# Altium PCB ecoVENTPS_v1.1.PcbDoc
Units mm, origin at the board's own origin, x right, y up, seen from the top; angles counter-clockwise.
Board outline 18 x 8 mm, 4 copper layers (Top Layer, GND, VCC, Bottom Layer), stack 1.733 mm thick; 21 components, 10 nets, 39 pads, 7 vias.
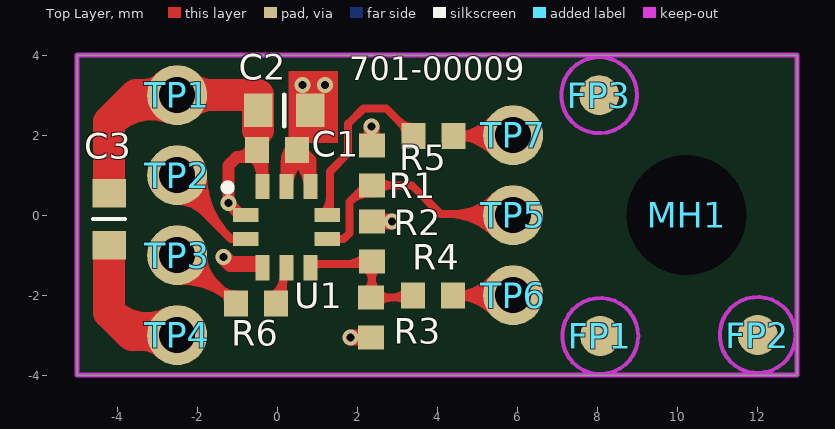
[diagram p0: Top Layer view]
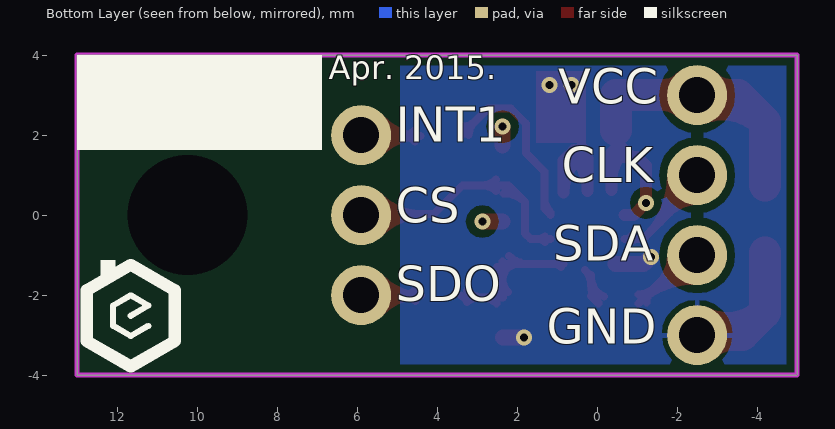
[diagram p1: Bottom Layer view, seen from below]
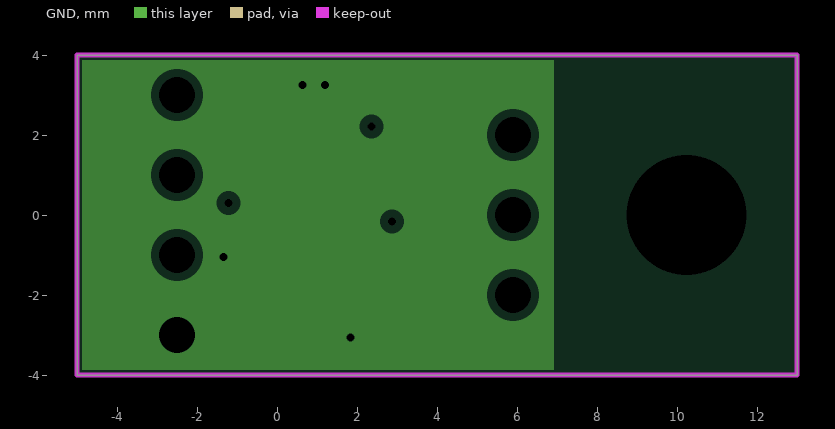
[diagram p2: GND, clearances drawn from the general rule]
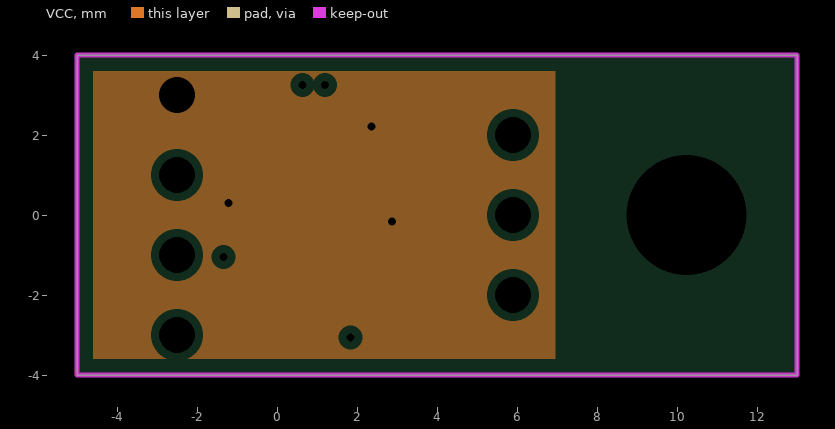
[diagram p3: VCC, clearances drawn from the general rule]
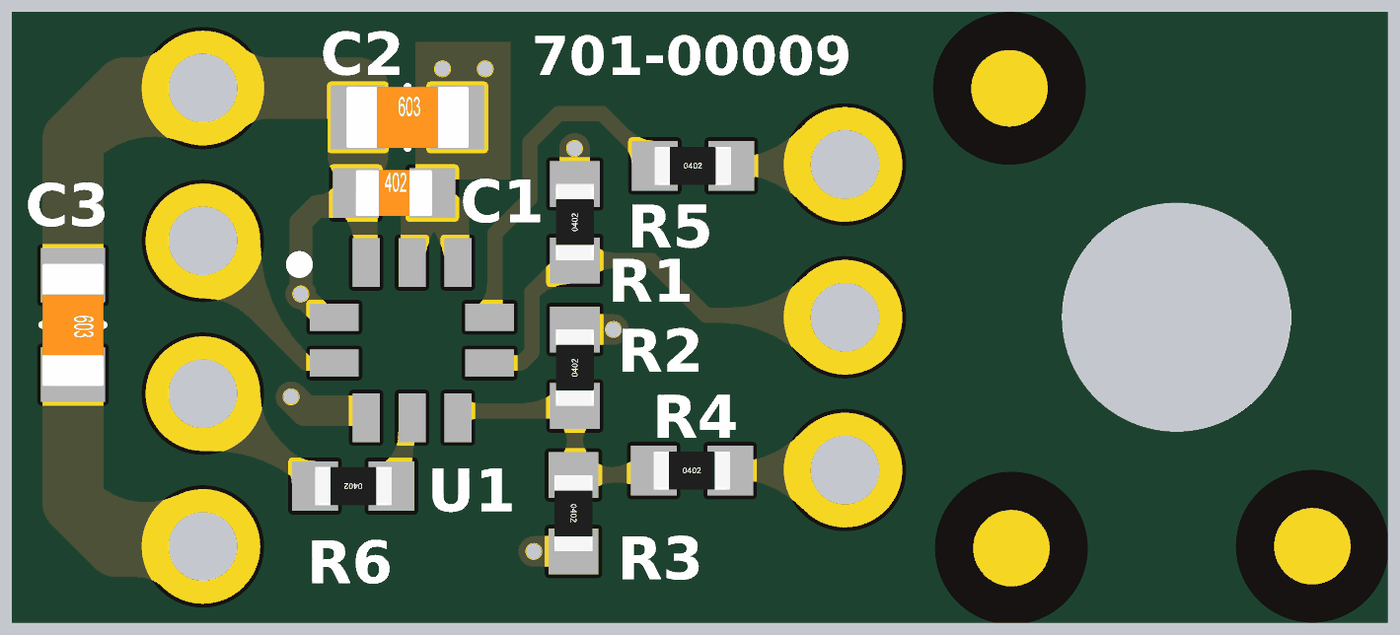
[diagram p4: 3D render of the assembled board from above, using the file's embedded part models]

## Layer stack, top to bottom
Top Solder: solder mask 0.0102, Solder Resist, Dk 3.5
Top Layer: signal copper 0.0525
Dielectric1: prepreg 0.3038, FR-4, Dk 4
GND: plane copper 0.035, net GND
Dielectric2: core 0.95, FR-4, Dk 4
VCC: plane copper 0.035, net VCC
Dielectric3: prepreg 0.3038, FR-4, Dk 4
Bottom Layer: signal copper 0.0525
Bottom Solder: solder mask 0.0102, Solder Resist, Dk 3.5

## Board outline
-5,-4 -5,4 13,4 13,-4

## Design rules (kind name [scope] priority, off if disabled: settings)
Clearance Clearance_KeepOut [(InNamedPolygon('Top Layer-GND FILL'))or (InNamedPolygon('Bot Layer-GND FILL')) vs (IsTrack AND OnLayer('Keep-Out Layer'))] p1: gap=0.3
Clearance "Clearance_GND FILL" [(InNamedPolygon('Top Layer-GND FILL'))or (InNamedPolygon('Bottom Layer-GND FILL'))] p2: gap=0.2
Clearance [All] p3: gap=0.127
ComponentClearance [All] p1: gap=0 collisioncheckmode=3 verticalgap=0.254 showdistances=FALSE
DiffPairsRouting [All] p1: maxlimit=0.254 minlimit=0.2 mostfreqgap=0.2 toplayer_minwidth=0.3 toplayer_maxwidth=0.381 toplayer_prefwidth=0.381 bottomlayer_minwidth=0.3 bottomlayer_maxwidth=0.381 bottomlayer_prefwidth=0.381 maxuncoupledlength=12.7
HoleSize [All] p1: absolutevalues=TRUE maxlimit=6 minlimit=0.025 maxpercent=80.000 minpercent=20.000
HoleToHoleClearance [All] p1: gap=0.2 allowstackedmicrovias=TRUE
MinimumSolderMaskSliver [All] p1: minsoldermaskwidth=0.05
PlaneClearance [All] p1: clearance=0.2
PlaneConnect [All] p1: planeconnectstyle=Relief reliefexpansion=0.127 reliefentries=4 reliefconductorwidth=0.127 reliefairgap=0.127
PolygonConnect "PolygonConnect_Components TR" [(IsNamedPolygon('Top Layer-GND FILL')) or (IsNamedPolygon('Bottom Layer-GND FILL')) vs (InComponent('TP4'))] p1: connectstyle=Relief reliefconductorwidth=0.127 reliefentries=4 polygonreliefangle="90 Angle" airgapwidth=0.127
PolygonConnect [All] p2: connectstyle=Direct reliefconductorwidth=0.2 reliefentries=4 polygonreliefangle="90 Angle" airgapwidth=0.254
RoutingVias [All] p1: holewidth=0.3 width=0.6 viastyle="Through Hole" minholewidth=0.2 minwidth=0.4 maxholewidth=1 maxwidth=2
SilkToSilkClearance [All] p1 off: silktosilkclearance=0.254
SilkToSolderMaskClearance SilkscreenOverComponentPads [IsPad] p1 off: minsilkscreentomaskgap=0.001 clearancetoexposedcopper=TRUE
SolderMaskExpansion [All] p1: expansion=0.05
Width [All] p1: maxlimit=5 minlimit=0.127 preferedwidth=0.127
20 further rules are at their usual default settings.

## Classes and differential pairs
component class "eVPS_Cover Page": FP1 FP2 FP3 MH1
component class eVPS_Sensor: C1 C2 C3 R1 R2 R3 R4 R5 R6 TP1 TP2 TP3 TP4 TP5 TP6 TP7 U1
component class "eVPS_Top Level": S1 W1 W2 W3 W4

## Components (designator, comment, footprint, x,y, rotation, side; value= is the part's Value field where it differs from the comment)
C1 "0.1uF" CAPC1005X60N 0,1.626 r0 top
C2 "10uF" CAPC1608X95B 0.178,2.616 r0 top
C3 "10uF" CAPC1608X95B -4.2,-0.1 r270 top
FP1 "FP 1/2mm" FIDUCIAL_POINT_1MM 8.077,-3.023 r0 top
FP2 "FP 1/2mm" FIDUCIAL_POINT_1MM 12.014,-2.997 r90 top
FP3 "FP 1/2mm" FIDUCIAL_POINT_1MM 8.052,2.997 r90 top
MH1 "MH 3/6mm" MHOLE_TH_3-6MM 10.236,0 r0 top
R1 "10K" RESC1005X40AN 2.366,1.245 r90 top
R2 "DNP" RESC1005X40AN 2.366,-0.66 r90 top
R3 "10K" RESC1005X40AN 2.348,-2.565 r270 top
R4 "DNP" RESC1005X40AN 3.897,-2.007 r0 top
R5 "DNP" RESC1005X40AN 3.912,1.981 r0 top
R6 "22R" RESC1005X40AN -0.533,-2.21 r180 top
TP1 "VCC" TEST_POINT_TH_1.5MM -2.5,3 r0 top
TP2 "CLK" TEST_POINT_TH_1.5MM -2.5,1 r90 top
TP3 "SDA" TEST_POINT_TH_1.5MM -2.5,-1 r90 top
TP4 "GND" TEST_POINT_TH_1.5MM -2.5,-3 r90 top
TP5 "CS" TEST_POINT_TH_1.5MM 5.9,0 r90 top
TP6 "SDO" TEST_POINT_TH_1.5MM 5.9,-2 r90 top
TP7 "INT1" TEST_POINT_TH_1.5MM 5.9,2 r90 top
U1 "LPS25H" STM_HCLGA10L 0.235,-0.3 r90 top

## Footprints (in the part's own frame and the unit in brackets; to place one, negate y for a bottom-side part, rotate by r counter-clockwise, add the part's x,y. Pads: shape width x height; smd on the part's side, far side on the other; paste and mask are expansions set on the pad)
CAPC1005X60N [mm]
  rect 0.6x0.65 smd mask+0.051: 1(-0.5,0) 2(0.5,0)
  body extent -0.5,-0.3 0.5,0.3, height 0.19
CAPC1608X95B [mil]
  rect 28x33 smd: 1(-25.59,0) 2(25.59,0)
  silkscreen extent 0,-16 0,16, body extent -31,-16 32,16, height 12
FIDUCIAL_POINT_1MM [mm]
  round 1 smd paste-0.5 mask+0.5: 0(0,0)
  Top Layer keep-out circle w0.1: c0,0 r0.951
MHOLE_TH_3-6MM [mm]
  round 0 hole 3 unplated mask+0.051: ""(0,0)
RESC1005X40AN [mm]
  rect 0.6x0.65 smd: 1(-0.5,0) 2(0.5,0)
  body extent -0.5,-0.25 0.5,0.25, height 0.35
STM_HCLGA10L [mil]
  rect 14x25 smd: 1(11.81,40) 2(-11.81,40) 6(-11.81,-40) 7(11.81,-40)
  rect 25x14 smd: 3(-40,23.62) 4(-40,0) 5(-40,-23.62) 8(40,-23.62) 9(40,0) 10(40,23.62)
  silkscreen extent 38,57 40,59, body extent -49,-49 49,49, height 43
TEST_POINT_TH_1.5MM [mm]
  round 1.5 hole 0.9 mask+0.051: 1(0,0)

## Part data
C1: library part "Cap-1005 (0402) CER 0.1UF 16V X7R 10%", "CAP CER 0.1UF 0402 (1005) 16V X7R 10%"
C2 C3: library part "Cap-1608 (0603) CER 10uF 10V X5R 20%", "Capacitor Ceramic 10uF 1608 (0603) 10V X5R 20%"
FP1 FP2 FP3: "Fiducial point"
MH1: "Mounting Hole Not-plated"
R1 R2 R3: library part "Res-1005 (0402) 10 KOhm 1/16 1%", "RES 10 KOhm 1/16W 1% 0402 SMD"
R4 R5 R6: library part "Res-1005 (0402) 22 Ohm 1/8W 1%", "Res-1005 (0402) 22 Ohm 1/8W 1%"
TP1 TP2 TP3 TP4 TP5 TP6 TP7: library part "TP TH 1X1.5mm", "Test point Through Hole"
U1: "MEMS Pressure Sensor"

## Via types
v1: diameter 0.4, hole 0.2, Top Layer to Bottom Layer, tented both sides, 7 vias

## Nets (pads, with @x,y where several pads share a name; then routed paths per layer and width w, separated by ;. In a path a pad name is that pad's centre, name@x,y a point inside that pad or via, vN(x,y) a via of type N, cw(c..) or ccw(c..) an arc to the next point about the centre after c; other vN are vias at no path point)
\CS: R1.1 TP5.1 U1.6 | length 12
  Top Layer w0.2: U1.6@1.16,-0.6 1.661,-0.6 1.803,-0.457 1.803,0.33 2.218,0.745 R1.1 3.366,0.745 4.085,0.025 5.875,0.025 TP5.1 ; U1.6@1.306,-0.671 cw(c1.476,-0.841) 1.476,-0.6 cw(c1.476,-0.359) U1.6@1.306,-0.529 ; 1.804,0.33 cw(c2.341,-0.236) R1.1@2.341,0.545 ; R1.1@2.533,0.603 cw(c2.874,0.262) 2.874,0.745 cw(c2.874,1.227) R1.1@2.533,0.886 ; 4.269,0.025 cw(c4.269,-1.631) TP5.1@5.44,-0.46 ; 4.392,0.025 ccw(c4.392,1.508) TP5.1@5.44,0.46 ; 4.752,0.025 cw(c4.752,-1.148) TP5.1@5.582,-0.318 ; 4.875,0.025 ccw(c4.875,1.025) TP5.1@5.582,0.318
CLK: TP2.1 U1.2 | length 7.8
  Top Layer w0.2: TP2.1@-2.5,0.35 cw(c-2.5,-0.609) -1.822,0.069 ; TP2.1 -2.5,0.747 -1.153,-0.6 U1.2@-0.69,-0.6 ; TP2.1@-2.25,1 ccw(c-1.037,1) -1.895,0.142 ; TP2.1@-2.05,1 ccw(c-0.354,1) -1.553,-0.199 ; TP2.1@-1.85,1 ccw(c0.329,1) -1.212,-0.541 ; U1.2@-0.836,-0.671 ccw(c-1.006,-0.841) -1.006,-0.6 ccw(c-1.006,-0.359) U1.2@-0.836,-0.529
GND: C1.2 C2.2 C3.2 R3.2 TP4.1 U1.3 U1.8 U1.9 | length 13.4
  Top Layer w0.3: U1.9@0.235,0.599 cw(c1.502,0.599) C1.2@0.606,1.495 ; U1.9@0.235,0.625 0.235,1.284 ; C1.2@0.235,1.323 cw(c0.778,1.323) C1.2@0.394,1.707 ; C1.2@0.35,1.591 cw(c-0.045,1.565) 0.235,1.284 ; C1.2@0.404,1.485 cw(c-0.354,0.569) U1.8@0.835,0.569 ; C1.2@0.533,1.454 cw(c0.605,1.136) 0.835,1.367 ; U1.8@0.835,0.625 0.835,1.367 ; 0.235,1.284 0.576,1.626 0.835,1.367
  Top Layer w0.4: TP4.1 TP4.1@-2.435,-3.065 ; v1(-1.346,-1.041) -1.163,-1.225 U1.3@-0.456,-1.225 ; v1(1.829,-3.065) R3.2
  Top Layer w0.8: C3.2@-4.2,-0.94 -4.2,-2.429 ; TP4.1@-2.747,-3.247 ccw(c-3.345,-3.845) -3.345,-3 ccw(c-3.345,-2.155) TP4.1@-2.747,-2.753 ; TP4.1@-2.654,-2.686 cw(c-3.248,-1.477) -4.2,-2.429 ; TP4.1 -3.629,-3 -4.2,-2.429
  other v1: 0.635,3.251 1.194,3.251
INT1: R5.2 TP7.1 | length 6.1
  Top Layer w0.2: R5.2@4.553,1.84 cw(c4.894,1.498) 4.894,1.981 cw(c4.894,2.464) R5.2@4.553,2.123 ; 4.857,1.981 ccw(c4.857,2.926) TP7.1@5.564,2.299 ; 4.883,1.981 cw(c4.883,1.017) TP7.1@5.576,1.687 ; TP7.1@5.414,2.432 cw(c4.412,3.322) R5.2 ; TP7.1@5.433,1.548 ccw(c4.412,0.561) R5.2 ; TP7.1 5.881,1.981 R5.2
NetR2_1: R2.1 R3.1 R4.1 U1.5 | length 7.7
  Top Layer w0.2: U1.5@0.835,-1.225 2.302,-1.225 R2.1 2.366,-2.047 R3.1 3.339,-2.065 R4.1 ; U1.5@0.906,-1.296 cw(c1.076,-1.466) 1.076,-1.225 cw(c1.076,-0.984) U1.5@0.906,-1.154 ; 1.702,-1.225 ccw(c1.702,-0.522) R2.1@2.2,-1.019 ; 2.014,-1.225 cw(c2.014,-1.487) R2.1@2.2,-1.302 ; R2.1@2.225,-1.302 cw(c1.883,-1.643) 2.366,-1.643 cw(c2.849,-1.643) R2.1@2.508,-1.302 ; R3.1@2.232,-1.924 ccw(c1.907,-1.599) 2.366,-1.599 ; 2.366,-1.566 ccw(c2.872,-1.566) 2.514,-1.924 ccw(c2.856,-1.583) 2.856,-2.065 ccw(c2.856,-2.548) R3.1@2.514,-2.207 ; 2.833,-2.065 ccw(c2.833,-1.467) R4.1@3.256,-1.89 ; 2.996,-2.065 cw(c2.996,-2.433) R4.1@3.256,-2.173
NetR5_1: R5.1 U1.7 | length 5.8
  Top Layer w0.2: U1.7@1.16,0 1.321,0.161 1.321,1.092 1.778,1.549 1.778,2.286 2.159,2.667 2.726,2.667 R5.1 ; U1.7@1.164,0.071 ccw(c0.786,0.449) 1.321,0.449 ; 3.028,2.365 ccw(c3.412,2.749) R5.1@3.412,2.206 ; 3.088,2.305 cw(c2.789,2.006) R5.1@3.212,2.006
NetR6_1: R6.1 U1.4 | length 1.8
  Top Layer w0.2: R6.1@-0.169,-2.037 ccw(c-0.39,-1.536) U1.4@0.157,-1.502 ; R6.1 R6.1@0.152,-2.024 ; R6.1@-0.033,-2.185 ccw(c-0.421,-1.762) 0.152,-1.762 ; 0.152,-1.741 cw(c0.676,-1.741) U1.4@0.306,-1.371
SDA: R6.2 TP3.1 | length 7.2
  Top Layer w0.2: TP3.1 -2.243,-1 R6.2 ccw(c-2.39,-3.567) TP3.1@-2.472,-1.649 ; TP3.1@-2.489,-1.25 cw(c-2.443,-2.332) -1.677,-1.566 ; TP3.1@-2.481,-1.45 cw(c-2.417,-2.949) -1.355,-1.888 ; TP3.1@-1.85,-1 ccw(c-0.901,-1) -1.572,-1.671 ; -1.417,-1.826 ccw(c-1.033,-1.442) R6.2@-1.033,-1.985 ; -1.357,-1.886 cw(c-1.656,-2.185) R6.2@-1.233,-2.185
SDO: R4.2 TP6.1 | length 6.2
  Top Layer w0.2: R4.2@4.539,-2.148 cw(c4.88,-2.489) 4.88,-2.007 cw(c4.88,-1.524) R4.2@4.539,-1.865 ; 4.855,-2.007 ccw(c4.855,-1.033) TP6.1@5.57,-1.694 ; 4.865,-2.007 cw(c4.865,-2.987) TP6.1@5.574,-2.311 ; TP6.1@5.423,-1.558 cw(c4.397,-0.609) R4.2 ; TP6.1@5.43,-2.449 ccw(c4.397,-3.433) R4.2 ; TP6.1 5.893,-2.007 R4.2
VCC: C1.1 C2.1 C3.1 R1.2 R2.2 TP1.1 U1.1 U1.10 | length 16.4
  Top Layer w0.3: U1.1@-0.69,0 -0.914,0 v1(-1.219,0.305) -1.219,1.241 -1.01,1.45 ; C1.1@-0.631,1.673 cw(c-1.01,1.883) -1.01,1.45 ; C1.1@-0.606,1.495 cw(c-1.188,0.913) U1.10@-0.365,0.913 ; C1.1 -0.676,1.45 -1.01,1.45 ; C1.1@-0.424,1.626 -0.365,1.567 U1.10@-0.365,0.625
  Top Layer w0.4: v1(2.362,2.21) 2.362,1.749 R1.2 ; R2.2 v1(2.87,-0.16)
  Top Layer w0.8: C3.1@-4.2,0.737 -4.2,2.328 ; TP1.1@-2.747,2.753 ccw(c-3.345,2.155) -3.345,3 ccw(c-3.345,3.845) TP1.1@-2.747,3.247 ; TP1.1@-2.622,2.672 ccw(c-3.143,1.271) -4.2,2.328 ; TP1.1@-2.253,2.753 cw(c-1.655,2.155) -1.655,3 cw(c-1.655,3.845) TP1.1@-2.253,3.247 ; -0.472,2.134 C2.1 -0.472,3 TP1.1 -3.528,3 -4.2,2.328
pads on no net: FP1.0 FP2.0 FP3.0 MH1.

## Polygon pours and split planes (outlines as drawn)
GND on Bottom Layer "Bottom Layer-GND FILL" (solid, remove dead copper, pour order 4): -5,-4 -5,4 4.928,4 4.928,-4
GND on GND (split plane): 6.934,-3.871 -4.871,-3.871 -4.871,3.871 6.934,3.871
VCC on VCC (split plane): 6.96,-3.598 -4.598,-3.598 -4.598,3.598 6.96,3.598

## Keep-outs
Keep-Out Layer:
  the board outline again, w0.127

## Other copper
Top Layer:
  rectangle net GND: 0.279,1.803 1.524,3.607
GND (plane layer: these items are gaps in the copper):
  rectangle: 6.934,-4 12.954,4
VCC (plane layer: these items are gaps in the copper):
  rectangle: 6.96,-4 13,4

## Silkscreen, mask and mechanical layers (free items; w line width, h text height)
Top Overlay:
  text "701-00009" at 1.803,3.175 h1
Bottom Overlay:
  rectangle: 6.883,1.626 13,4
  region: 12.421,-1.118 12.04,-1.118 12.04,-1.562 12.421,-1.562
  lines w0.152: 11.219,-2.769 11.659,-3.023 12.099,-2.769 12.099,-2.261 11.659,-2.007 11.219,-2.261 11.659,-2.515
  lines w0.305: 10.559,-3.15 11.659,-3.785 12.758,-3.15 12.758,-1.88 11.659,-1.245 10.559,-1.88 10.559,-3.15
  text "Apr. 2015." at 6.706,3.2 h1
BoardOutline:
  the board outline again, w0.127
StackUp:
  drawing of 295 lines, arcs and shapes, not listed
  text "Layer" at 37.77,30.582 h1.52
  text "Name" at 48.182,30.582 h1.52
  text "Material" at 71.797,30.582 h1.52
  text "Thickness" at 93.635,30.582 h1.52
  text "Constant" at 110.141,30.582 h1.52
  text "Board Layer Stack" at 124.615,30.582 h1.52
  text "1" at 37.77,27.534 h1.52
  text "Top Overlay" at 48.182,27.534 h1.52
  text "2" at 37.77,24.486 h1.52
  text "Top Solder" at 48.182,24.486 h1.52
  text "Solder Resist" at 71.797,24.486 h1.52
  text "0.40mil" at 93.635,24.486 h1.52
  text "3.5" at 110.141,24.486 h1.52
  text "3" at 37.77,21.438 h1.52
  text "Top Layer" at 48.182,21.438 h1.52
  text "Copper" at 71.797,21.438 h1.52
  text "2.07mil" at 93.635,21.438 h1.52
  text "4" at 37.77,18.39 h1.52
  text "Dielectric1" at 48.182,18.39 h1.52
  text "FR-4" at 71.797,18.39 h1.52
  text "11.96mil" at 93.635,18.39 h1.52
  text "4" at 110.141,18.39 h1.52
  text "5" at 37.77,15.342 h1.52
  text "GND" at 48.182,15.342 h1.52
  text "Copper" at 71.797,15.342 h1.52
  text "1.38mil" at 93.635,15.342 h1.52
  text "6" at 37.77,12.294 h1.52
  text "Dielectric2" at 48.182,12.294 h1.52
  text "FR-4" at 71.797,12.294 h1.52
  text "37.40mil" at 93.635,12.294 h1.52
  text "4" at 110.141,12.294 h1.52
  text "7" at 37.77,9.246 h1.52
  text "VCC" at 48.182,9.246 h1.52
  text "Copper" at 71.797,9.246 h1.52
  text "1.38mil" at 93.635,9.246 h1.52
  text "8" at 37.77,6.198 h1.52
  text "Dielectric3" at 48.182,6.198 h1.52
  text "FR-4" at 71.797,6.198 h1.52
  text "11.96mil" at 93.635,6.198 h1.52
  text "4" at 110.141,6.198 h1.52
  text "9" at 37.77,3.15 h1.52
  text "Bottom Layer" at 48.182,3.15 h1.52
  text "Copper" at 71.797,3.15 h1.52
  text "2.07mil" at 93.635,3.15 h1.52
  text "10" at 37.77,0.102 h1.52
  text "Bottom Solder" at 48.182,0.102 h1.52
  text "Solder Resist" at 71.797,0.102 h1.52
  text "0.40mil" at 93.635,0.102 h1.52
  text "3.5" at 110.141,0.102 h1.52
  text "11" at 37.77,-2.946 h1.52
  text "Bottom Overlay" at 48.182,-2.946 h1.52
  text "Top/Bottom Copper Thickness min 0.050mm after plating." at 35.906,-8.379 h1.5
  text "Total Board Thickness:" at 35.906,-11.379 h1.5
  text "1.75mm" at 74.906,-11.379 h1.5
  text "Surface Finish:" at 35.906,-14.379 h1.5
  text "ENIG" at 74.906,-14.379 h1.5
  text "Solder Mask Color:" at 35.906,-17.379 h1.5
  text "Green" at 74.906,-17.379 h1.5
  text "Minimums:" at 35.906,-22.379 h1.5
  text "Minimal Clearance:" at 35.906,-25.379 h1.5
  text "0.127mm" at 74.906,-25.379 h1.5
  text "Minimal Track Width:" at 35.906,-28.379 h1.5
  text "0.2mm" at 74.906,-28.379 h1.5
  text "Minimal Via Size:" at 35.906,-31.379 h1.5
  text "0.4/0.2mm" at 74.906,-31.379 h1.5
  text "Minimal Hole Size:" at 35.906,-34.379 h1.5
  text "0.2mm" at 74.906,-34.379 h1.5

## Dimensions
13,-4 to 13,4 on Dimensions
13,-4 to -5,-4 on Dimensions